# Altium PCB HKCV4.PcbDoc
Units mm, origin at the board's own origin, x right, y up, seen from the top; angles counter-clockwise.
Board outline 37 x 37 mm, 4 copper layers (Top, Route2, Route3, Bottom), stack 2.11 mm thick; 65 components, 63 nets, 314 pads, 464 vias.
Unrouted connection lines stored in the file: 66.
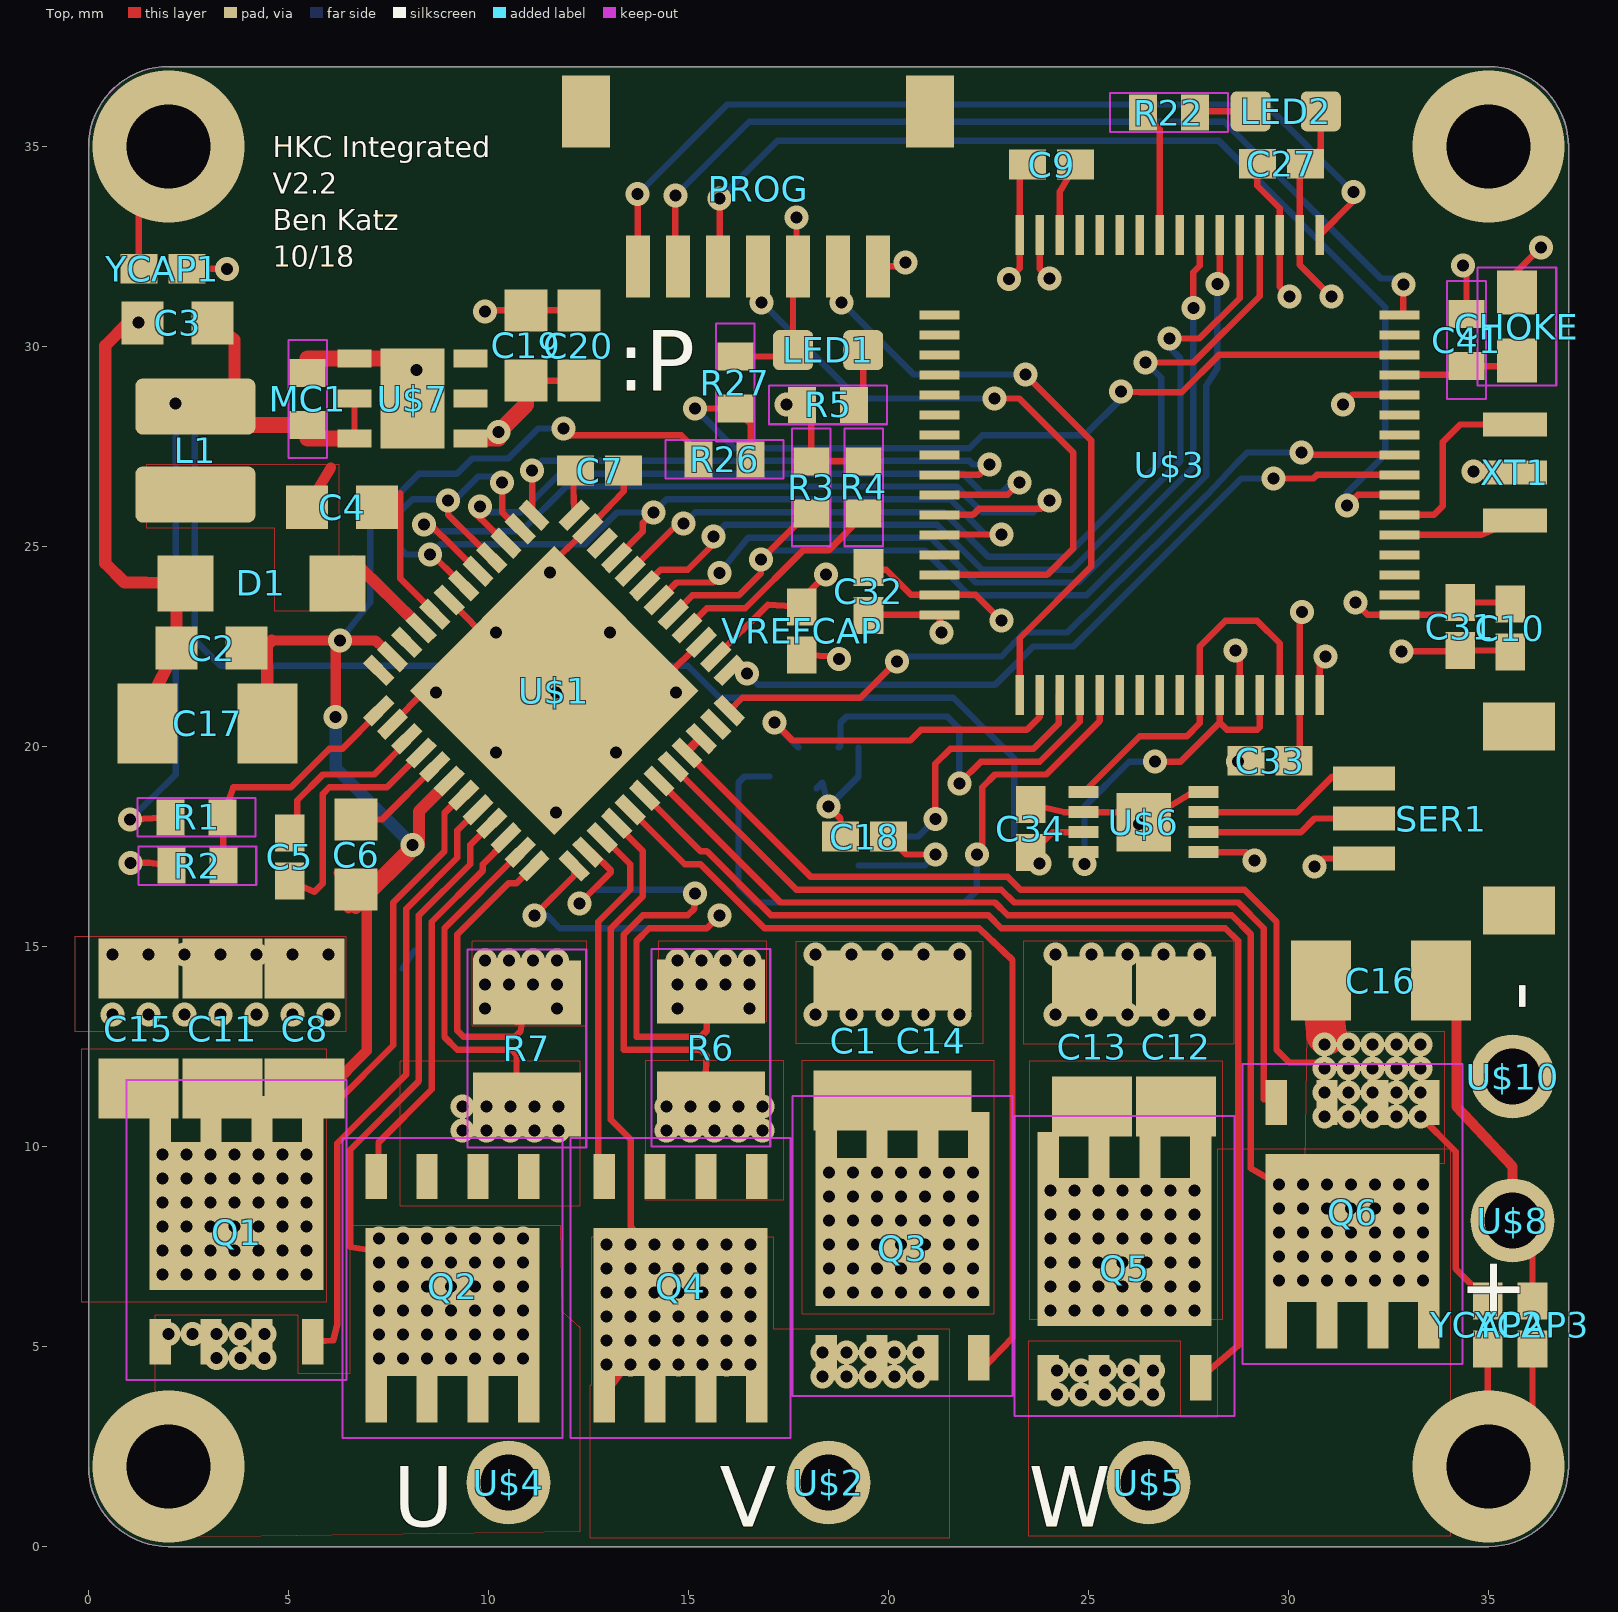
[diagram p0: Top view]
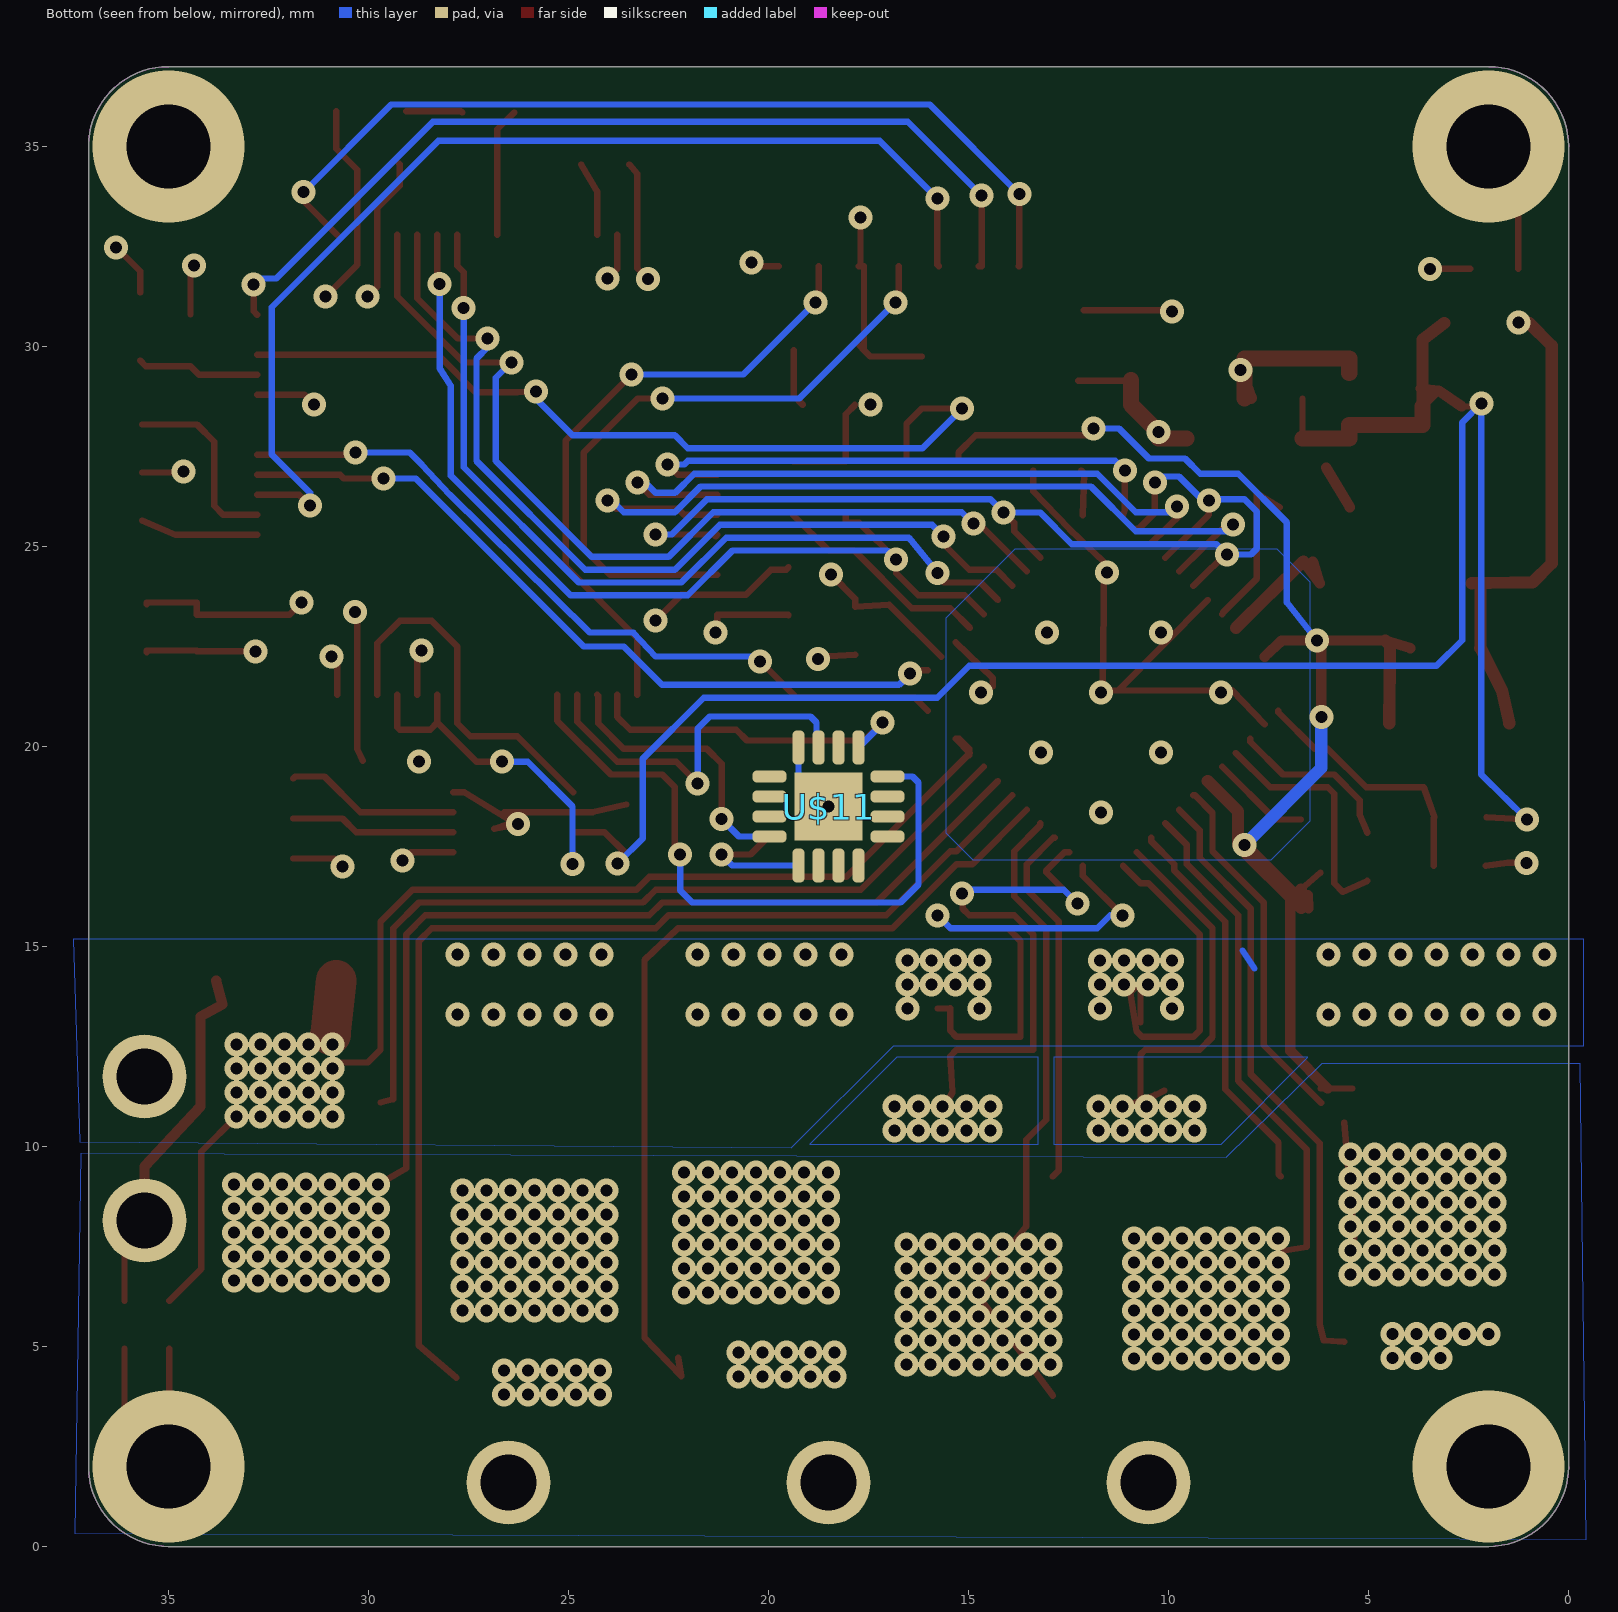
[diagram p1: Bottom view, seen from below]
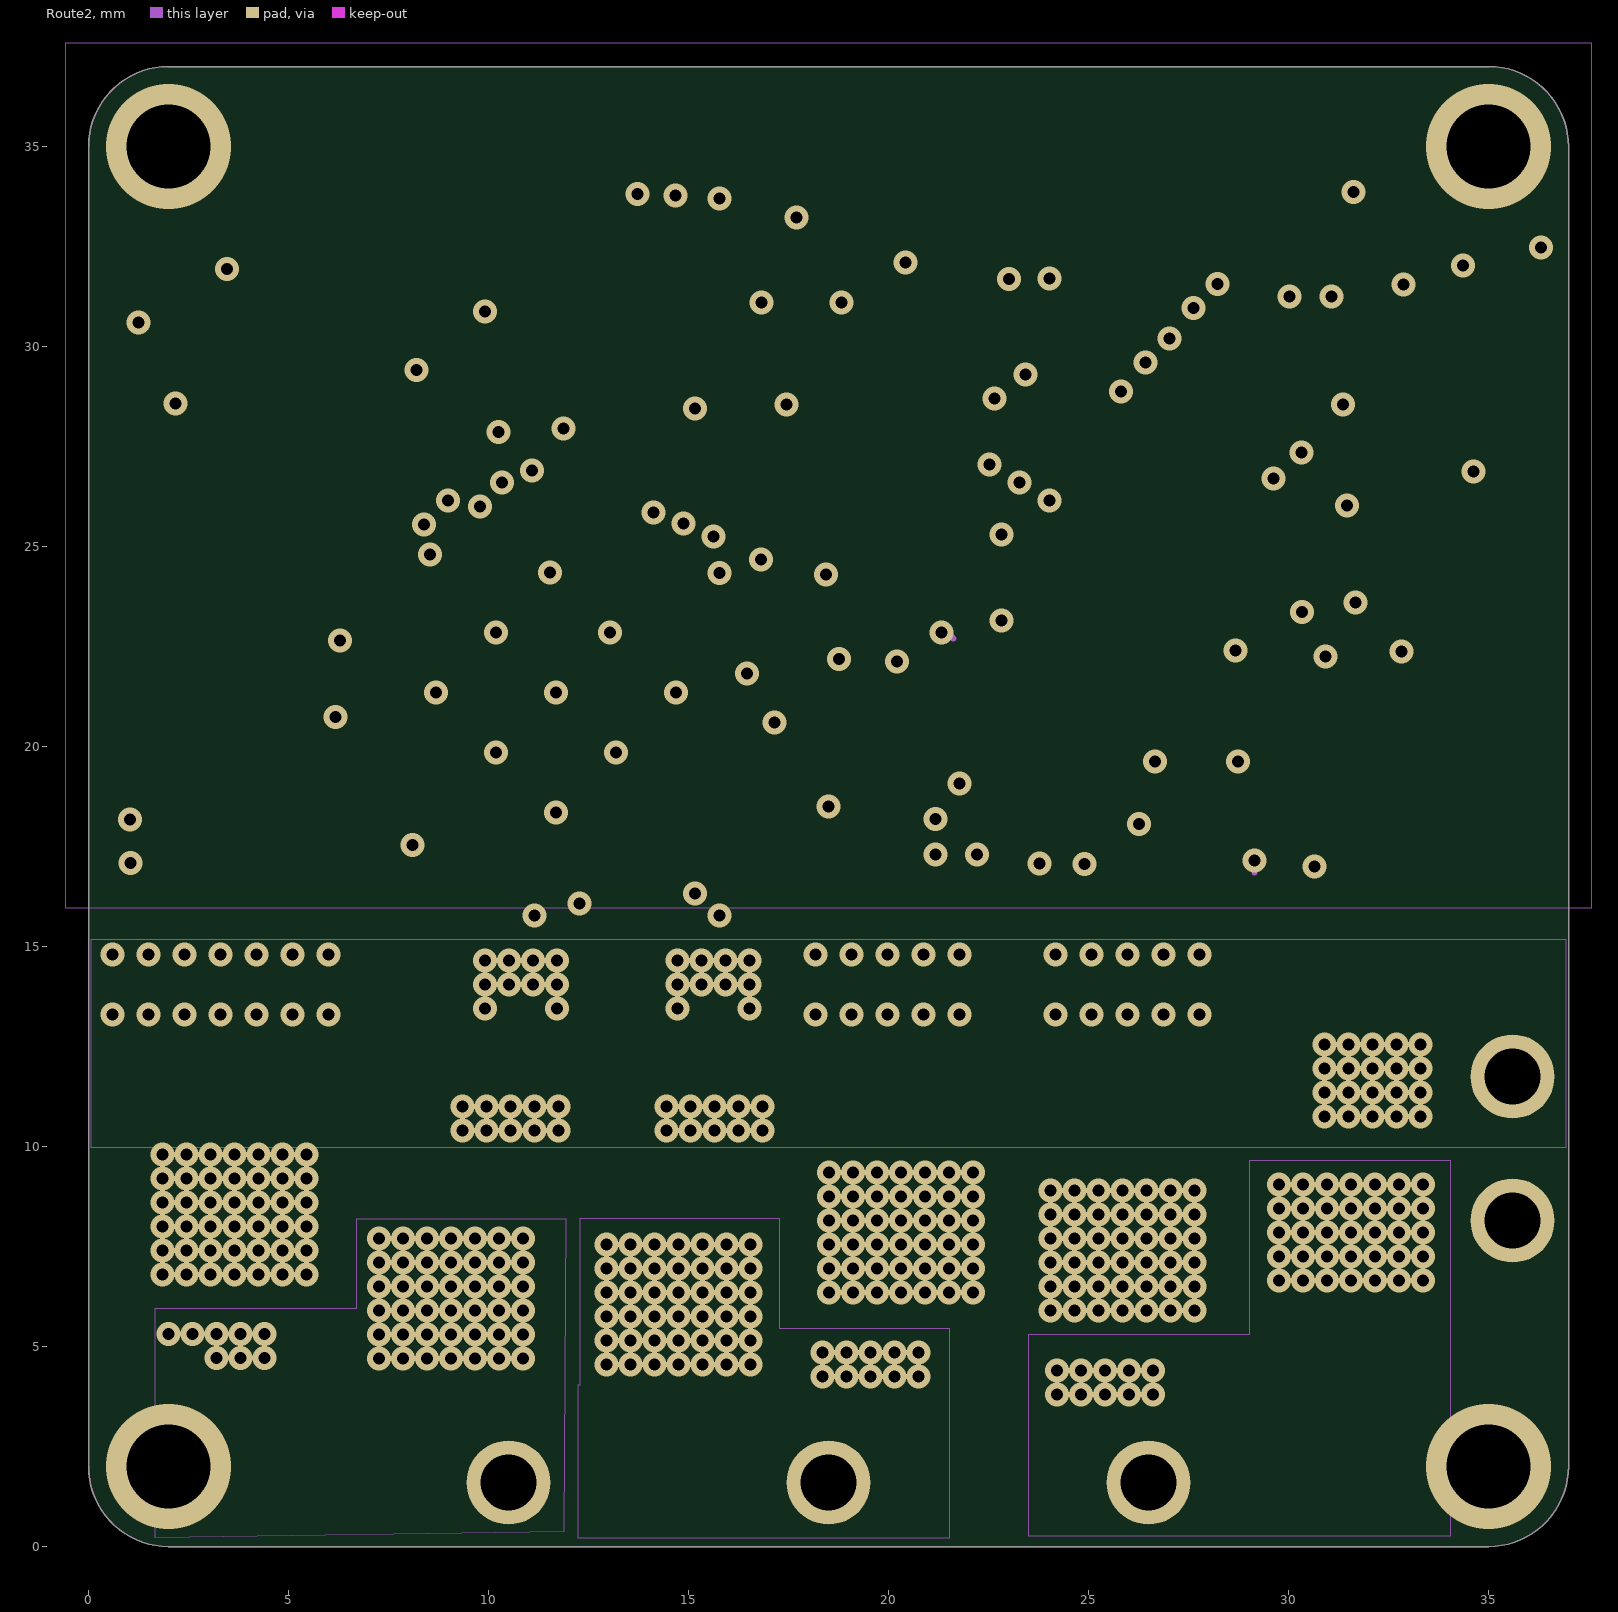
[diagram p2: Route2]
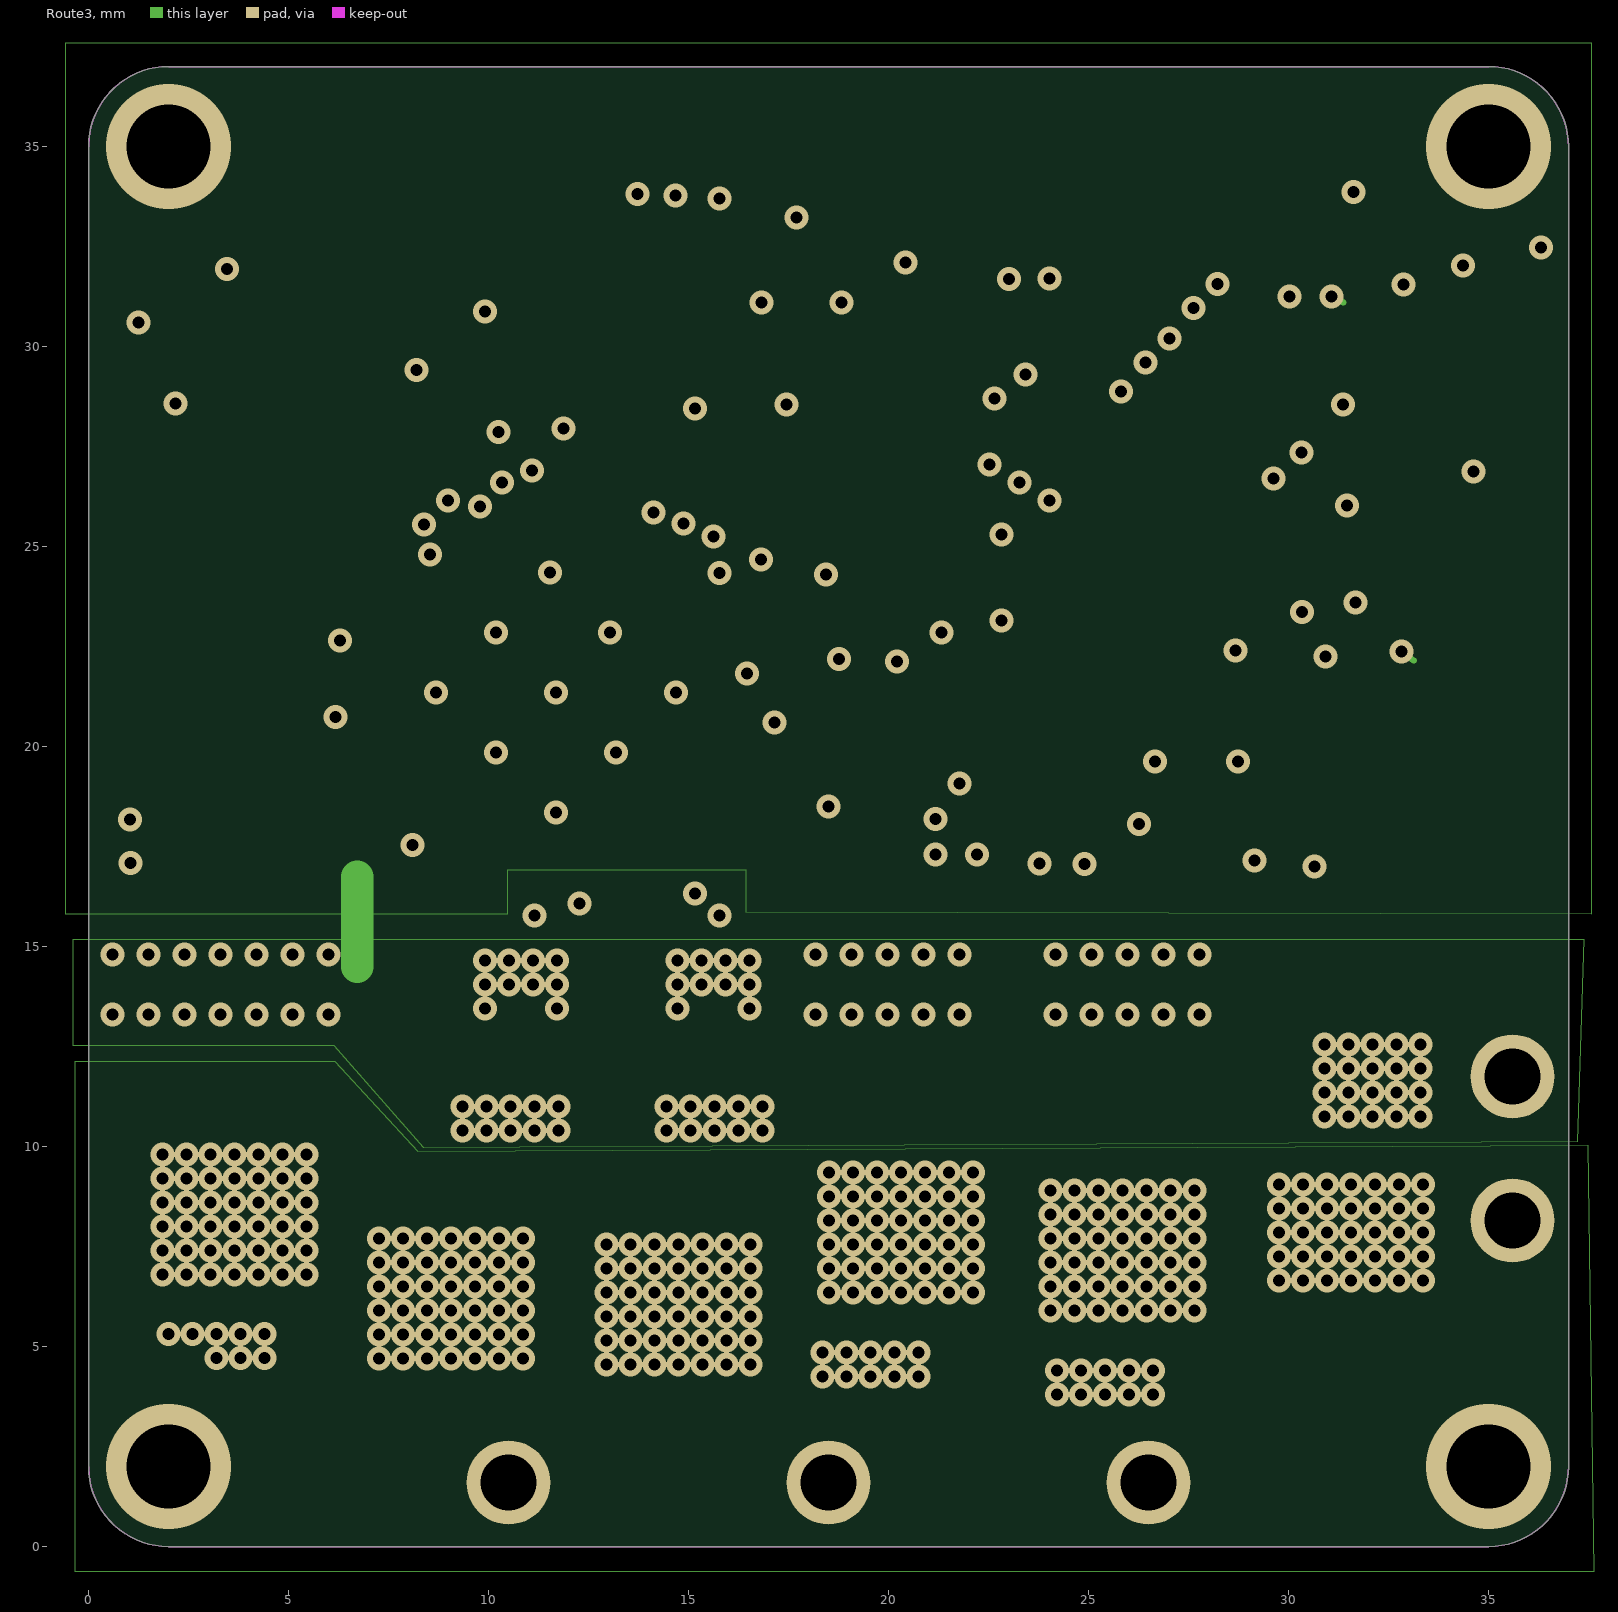
[diagram p3: Route3]

## Layer stack, top to bottom
Top Solder: solder mask 0.0102, Solder Resist, Dk 3.5
Top: signal copper 0.035
Dielectric 1: prepreg 1.5, FR-4, Dk 4.8
Route2: signal copper 0.035
Dielectric3: core 0.15, FR-4, Dk 4.8
Route3: signal copper 0.035
Dielectric2: dielectric 0.32, FR-4, Dk 4.8
Bottom: signal copper 0.035
Bottom Solder: solder mask 0.0102, Solder Resist, Dk 3.5

## Board outline
37,2 37,35 ccw(c35,35) 35,37 2,37 ccw(c2,35) 0,35 0,2 ccw(c2,2) 2,0 35,0 ccw(c35,2)

## Design rules (kind name [scope] priority, off if disabled: settings)
BoardOutlineClearance mdCopperDimension [All] p1: gap=0.254 ignorepadtopadclearanceinfootprint=FALSE except(0: Arc-SplitContinuation Track-SplitContinuation SMDPad-SplitContinuation THPad-SplitContinuation Via-SplitContinuation Fill-SplitContinuation Poly-SplitContinuation Region-SplitContinuation Text-SplitContinuation; 0.152: Poly-OutlineEdge Poly-CavityEdge Poly-CutoutEdge Poly-SplitBarrior)
Clearance Clearance_for_PolygonClass_Isolate_12 [InPolygonClass('Isolate_12') vs IsArc Or IsTrack Or IsPad Or IsVia Or IsFill Or IsRegion Or IsText] p1: gap=0.305 ignorepadtopadclearanceinfootprint=FALSE
Clearance Clearance_for_PolygonClass_Isolate_10 [InPolygonClass('Isolate_10') vs IsArc Or IsTrack Or IsPad Or IsVia Or IsFill Or IsRegion Or IsText] p2: gap=0.254 ignorepadtopadclearanceinfootprint=FALSE
Clearance "Clearance (Same Net)" [All] p3: gap=0.152 ignorepadtopadclearanceinfootprint=FALSE
Clearance [All] p4: gap=0.152 ignorepadtopadclearanceinfootprint=FALSE
HoleSize [All] p1: absolutevalues=TRUE maxlimit=2540 minlimit=0.3 maxpercent=80.000 minpercent=20.000
HoleToHoleClearance mdDrill [All] p1: gap=0.152 allowstackedmicrovias=TRUE
MinimumSolderMaskSliver [All] p1 off: minsoldermaskwidth=0.254
PasteMaskExpansion Expansion_SMDPaste_OFF [InPadClass('SMDPaste_OFF')] p1: expansion=0
PasteMaskExpansion mlMinCreamFrame [All] p2: expansion=0
PolygonConnect PolygonConnect_For_PolygonThermal_ON_Width100000_Gap100000 [InPolygonClass('PolygonThermal_ON_Width100000_Gap100000') vs Not IsVia] p1: connectstyle=Relief reliefconductorwidth=0.254 reliefentries=4 polygonreliefangle="90 Angle" airgapwidth=0.254
PolygonConnect PolygonConnect_For_PolygonThermal_OFF [InPolygonClass('PolygonThermal_OFF')] p2: connectstyle=Direct reliefconductorwidth=0.254 reliefentries=4 polygonreliefangle="90 Angle" airgapwidth=0.254
PolygonConnect ThermalVias [IsVia] p3: connectstyle=Direct reliefconductorwidth=0.254 reliefentries=4 polygonreliefangle="90 Angle" airgapwidth=0.254
PolygonConnect [All] p4: connectstyle=Relief reliefconductorwidth=0.254 reliefentries=4 polygonreliefangle="90 Angle" airgapwidth=0.254
RoutingVias [All] p1: holewidth=0.3 width=0.6 viastyle="Through Hole" minholewidth=0.3 minwidth=0.6 maxholewidth=2.54 maxwidth=2.54
SolderMaskExpansion Expansion_SMDSolder_OFF [InPadClass('SMDSolder_OFF')] p1: expansion=0 istentingtop=FALSE
SolderMaskExpansion mlMinStopFrame [All] p2: expansion=0.102 istentingtop=FALSE
Width [All] p1: maxlimit=0.254 minlimit=0.152 preferedwidth=0.152
26 further rules are at their usual default settings.

## Classes and differential pairs
polygon class PolygonThermal_ON_Width100000_Gap100000: Polygon_2_Net_SPA Polygon_2_Net_SPB
polygon class PolygonThermal_OFF: Polygon_1_Net_3V3 Polygon_1_Net_+24V Polygon_1_Net_GND Polygon_1_Net_PHASA Polygon_1_Net_PHASB Polygon_1_Net_PHASC Polygon_1_Net_SPA Polygon_1_Net_SPB Polygon_1_Net_SW Polygon_2_Net_+24V Polygon_2_Net_GND Polygon_2_Net_PHASA Polygon_2_Net_PHASB Polygon_2_Net_PHASC Polygon_3_Net_+24V Polygon_3_Net_GND Polygon_4_Net_+24V Polygon_4_Net_GND Polygon_5_Net_+24V Polygon_5_Net_GND Polygon_6_Net_GND Polygon_7_Net_GND Polygon_8_Net_GND Polygon_9_Net_GND Polygon_10_Net_GND Polygon_11_Net_GND
polygon class Isolate_12: Polygon_11_Net_GND
polygon class Isolate_10: Polygon_1_Net_3V3 Polygon_1_Net_+24V Polygon_1_Net_GND Polygon_1_Net_PHASA Polygon_1_Net_PHASB Polygon_1_Net_PHASC Polygon_1_Net_SPA Polygon_1_Net_SPB Polygon_2_Net_PHASA Polygon_2_Net_PHASB Polygon_2_Net_PHASC Polygon_2_Net_SPA Polygon_2_Net_SPB Polygon_3_Net_GND Polygon_4_Net_+24V Polygon_5_Net_+24V Polygon_6_Net_GND Polygon_7_Net_GND Polygon_9_Net_GND Polygon_10_Net_GND
pad class SMDSolder_OFF: U$7-1 U$7-2 U$7-3 U$7-4 U$7-5 U$7-6 U$7-EXP U$11-1 U$11-2 U$11-3 U$11-4 U$11-5 U$11-6 U$11-7 U$11-8 U$11-9 U$11-10 U$11-11 U$11-12 U$11-13 U$11-14 U$11-15 U$11-16 U$11-TH
pad class SMDPaste_OFF: Q1-EP Q2-EP Q3-EP Q4-EP Q5-EP Q6-EP U$7-1 U$7-2 U$7-3 U$7-4 U$7-5 U$7-6 U$7-EXP U$11-1 U$11-2 U$11-3 U$11-4 U$11-5 U$11-6 U$11-7 U$11-8 U$11-9 U$11-10 U$11-11 U$11-12 U$11-13 U$11-14 U$11-15 U$11-16 U$11-TH

## Components (designator, comment, footprint, x,y, rotation, side; value= is the part's Value field where it differs from the comment)
C1 "10" C1206K 19.13,12.65 r90 top
C2 ".1 uF" C0603K 3.08,22.46 r180 top
C3 "22 uF" C0603K 2.23,30.59 r180 top
C4 ".1 uF" C0603K 6.34,25.98 r0 top
C5 "47 nF" C0402K 5.03,17.24 r90 top
C6 "1 uF" C0603K 6.69,17.3 r90 top
C7 "1 uF" C0402K 12.78,26.9 r0 top
C8 "10" C1206K 5.4,12.95 r90 top
C9 "4.7" C0402K 24.08,34.55 r0 top
C10 "1uF" C0402K 35.54,22.96 r270 top
C11 "10" C1206K 3.35,12.95 r90 top
C12 "10" C1206K 27.19,12.5 r90 top
C13 "10" C1206K 25.09,12.5 r90 top
C14 "10" C1206K 21.07,12.65 r90 top
C15 "10" C1206K 1.25,12.95 r90 top
C16 "10" C1206K 32.31,14.15 r180 top
C17 ".1 uF" C1206K 2.98,20.58 r180 top
C18 ".1 uF" C0402K 19.4,17.75 r180 top
C19 "22uf" C0603K 10.94,30.03 r90 top
C20 "22uf" C0603K 12.26,30.02 r90 top
C27 "100nF" C0402K 29.83,34.57 r0 top
C31 "100nF" C0402K 34.29,23 r270 top
C32 "100nF" C0402K 19.5,23.88 r90 top
C33 ".1 uF" C0402K 29.54,19.64 r0 top
C34 ".1 uF" C0402K 23.56,17.95 r90 top
C41 "100nF" C0402 34.45,30.16 r90 top
CHOKE "600r" 0603 35.71,30.5 r270 top
D1 "" SOD123 4.32,24.08 r180 top
L1 "22uH" SDR0302 2.67,27.4 r0 top
LED1 "G" LED-0603 18.49,29.91 r90 top
LED2 "G" LED-0603 29.93,35.88 r270 top
MC1 "1uf" C0402 5.48,28.69 r90 top
PROG "SM07B-SRSS-TB" SM07B-SRSS-TB 16.74,34.98 r180 top
Q1 "TPH" TRANS_TPH5900CNH,L1Q 3.7,7.91 r90 top
Q2 "TPH" TRANS_TPH5900CNH,L1Q 9.1,6.46 r270 top
Q3 "TPH" TRANS_TPH5900CNH,L1Q 20.35,7.51 r90 top
Q4 "TPH" TRANS_TPH5900CNH,L1Q 14.8,6.46 r270 top
Q5 "TPH" TRANS_TPH5900CNH,L1Q 25.9,7.01 r90 top
Q6 "TPH" TRANS_TPH5900CNH,L1Q 31.6,8.31 r270 top
R1 "54.9k" R0402 2.7,18.23 r180 top
R2 "10k" R0402 2.72,17.02 r0 top
R3 "10k" R0402 18.07,26.48 r90 top
R4 "10k" R0402 19.38,26.48 r90 top
R5 "200" R0402 18.49,28.54 r180 top
R6 ".001" R1210 15.56,12.47 r270 top
R7 ".001" R1210 10.96,12.45 r270 top
R22 "200" R0402 27.01,35.85 r180 top
R26 "150k" R0402 15.9,27.18 r180 top
R27 "10k" R0402 16.17,29.1 r270 top
SER1 "SM03B-SRSS-TB" SM03B-SRSS-TB 34.86,18.2 r90 top
U$1 "DRV8323RH" QFN50P700X700X90-49N 11.64,21.4 r45 top
U$2 "" 18_AWG_PAD 18.5,1.6 r0 top
U$3 "STM32F446RET6" TQFP64 27.03,27.04 r90 top
U$4 "" 18_AWG_PAD 10.5,1.6 r0 top
U$5 "" 18_AWG_PAD 26.5,1.6 r0 top
U$6 "" TDFN 27.88,18.86 r270 top
U$7 "LDFM" DFN6-3X3 8.1,28.7 r180 top
U$8 "" 18_AWG_PAD 35.6,8.15 r0 top
U$10 "" 18_AWG_PAD 35.6,11.75 r90 top
U$11 "MA700" QFN16 18.5,18.5 r0 bottom
VREFCAP "100nF" C0402K 17.83,22.89 r270 top
XT1 "CSTCE" CSTCE 35.66,26.85 r90 top
YCAP1 "100nF" C0402K 1.86,31.94 r180 top
YCAP2 "100nF" C0402K 34.98,5.54 r270 top
YCAP3 "100nF" C0402K 36.1,5.54 r270 top

## Footprints (in the part's own frame and the unit in brackets; to place one, negate y for a bottom-side part, rotate by r counter-clockwise, add the part's x,y. Pads: shape width x height; smd on the part's side, far side on the other; paste and mask are expansions set on the pad)
18_AWG_PAD [mm] "18_AWG_PAD"
  round 2.1 hole 1.4: P$1(0,0)
  body extent -1.06,-1.06 1.06,1.06, height 1.27
0603 [mm] "0603"
  rect 1.1x1 smd: 1(-0.85,0) 2(0.85,0)
  Top keep-out lines w0.051: 1.473,-0.983 -1.473,-0.983 -1.473,0.983 1.473,0.983 1.473,-0.983
  body extent -1.5,-1.01 1.5,1.01, height 3.81
C0402 [mm] "C0402"
  rect 0.7x0.9 smd: 1(-0.65,0) 2(0.65,0)
  Top keep-out lines w0.051: -1.473,0.483 -1.473,-0.483 1.473,-0.483 1.473,0.483 -1.473,0.483
  body extent -1.5,-0.51 1.5,0.51, height 3.81
C0402K [mm] "C0402K"
  rect 0.925x0.74 smd: 1(-0.6,0) 2(0.6,0)
  body extent -1.06,-0.37 1.06,0.37, height 3.81
C0603K [mm] "C0603K"
  rect 1.05x1.08 smd: 1(-0.875,0) 2(0.875,0)
  body extent -1.4,-0.54 1.4,0.54, height 3.81
C1206K [mm] "C1206K"
  rect 1.5x2 smd: 1(-1.5,0) 2(1.5,0)
  body extent -2.25,-1 2.25,1, height 3.81
CSTCE [mm] "CSTCE"
  rect 0.6x1.6 smd: 1(-1.2,0) 2(0,0) 3(1.2,0)
  body extent -1.5,-0.8 1.5,0.8, height 1.27
DFN6-3X3 [mm] "DFN6-3X3"
  rect 0.85x0.45 smd paste+0 mask+0: 1(-1.45,1) 2(-1.45,0) 3(-1.45,-1) 4(1.45,-1) 5(1.45,0) 6(1.45,1)
  rect 1.6x2.5 smd paste+0 mask+0: EXP(0,0)
  body extent -1.93,-1.56 1.93,1.56, height 3.81
LED-0603 [mm] "LED-0603"
  rrect30% 1x1 smd: A(0,-0.877) C(0,0.877)
  body extent -0.51,-1.39 0.51,1.39, height 1.27
QFN16 [mm] "QFN16"
  rrect75% 0.85x0.3 smd paste+0 mask+0: 1(-1.475,0.75) 2(-1.475,0.25) 3(-1.475,-0.25) 4(-1.475,-0.75) 9(1.475,-0.75) 10(1.475,-0.25) 11(1.475,0.25) 12(1.475,0.75)
  rrect75% 0.3x0.85 smd paste+0 mask+0: 5(-0.75,-1.475) 6(-0.25,-1.475) 7(0.25,-1.475) 8(0.75,-1.475) 13(0.75,1.475) 14(0.25,1.475) 15(-0.25,1.475) 16(-0.75,1.475)
  rect 1.7x1.7 smd paste+0 mask+0: TH(0,0)
  body extent -1.91,-1.91 1.91,1.91, height 3.81
QFN50P700X700X90-49N [mil] "QFN50P700X700X90-49N"
  rect 32x12 smd: 1(-136,108) 2(-136,89) 3(-136,69) 4(-136,49) 5(-136,30) 6(-136,10) 7(-136,-10) 8(-136,-30) 9(-136,-49) 10(-136,-69) 11(-136,-89) 12(-136,-108) 25(136,-108) 26(136,-89) 27(136,-69) 28(136,-49) 29(136,-30) 30(136,-10) 31(136,10) 32(136,30) 33(136,49) 34(136,69) 35(136,89) 36(136,108)
  rect 12x32 smd: 13(-108,-136) 14(-89,-136) 15(-69,-136) 16(-49,-136) 17(-30,-136) 18(-10,-136) 19(10,-136) 20(30,-136) 21(49,-136) 22(69,-136) 23(89,-136) 24(108,-136) 37(108,136) 38(89,136) 39(69,136) 40(49,136) 41(30,136) 42(10,136) 43(-10,136) 44(-30,136) 45(-49,136) 46(-69,136) 47(-89,136) 48(-108,136)
  rect 201x201 smd: 49(0,0)
  body extent -152,-152 152,152, height 150
R0402 [mm] "R0402"
  rect 0.7x0.9 smd: 1(-0.65,0) 2(0.65,0)
  Top keep-out lines w0.051: 1.473,0.483 1.473,-0.483 -1.473,-0.483 -1.473,0.483 1.473,0.483
  body extent -1.5,-0.51 1.5,0.51, height 3.81
R1210 [mm] "R1210"
  rect 1.6x2.7 smd: 1(-1.4,0) 2(1.4,0)
  Top keep-out lines w0.051: 2.473,-1.483 -2.473,-1.483 -2.473,1.483 2.473,1.483 2.473,-1.483
  body extent -2.5,-1.51 2.5,1.51, height 3.81
SDR0302 [mm] "SDR0302"
  rrect25% 3x1.4 smd: 1(0,1.1) 2(0,-1.1)
  body extent -1.5,-1.8 1.5,1.8, height 3.81
SM03B-SRSS-TB [mm] "SM03B-SRSS-TB"
  rect 0.6x1.55 smd: 1(-1,2.975) 2(0,2.975) 3(1,2.975)
  rect 1.2x1.8 smd: FIT@1(-2.3,-0.9) FIT@2(2.3,-0.9)
  body extent -2.9,-1.8 2.9,3.75, height 3.81
SM07B-SRSS-TB [mm] "SM07B-SRSS-TB"
  rect 0.6x1.55 smd: 1(-3,2.975) 2(-2,2.975) 3(-1,2.975) 4(0,2.975) 5(1,2.975) 6(2,2.975) 7(3,2.975)
  rect 1.2x1.8 smd: FIT@1(-4.3,-0.9) FIT@2(4.3,-0.9)
  body extent -4.9,-1.8 4.9,3.75, height 3.81
SOD123 [mm] "SOD123"
  rect 1.4x1.4 smd: A(1.9,0) C(-1.9,0)
  body extent -2.6,-0.84 2.6,0.84, height 3.81
TDFN [mm] "TDFN"
  rect 0.3x0.75 smd: 1(0,-3) 2(0.5,-3) 3(1,-3) 4(1.5,-3) 5(1.5,0) 6(1,0) 7(0.5,0) 8(0,0)
  rect 1.46x1.36 smd: 9(0.75,-1.5)
  body extent -0.15,-3.38 1.65,0.38, height 1.27
TQFP64 [mm] "TQFP64"
  rect 0.22x1 smd: 1(-3.75,-5.75) 2(-3.25,-5.75) 3(-2.75,-5.75) 4(-2.25,-5.75) 5(-1.75,-5.75) 6(-1.25,-5.75) 7(-0.75,-5.75) 8(-0.25,-5.75) 9(0.25,-5.75) 10(0.75,-5.75) 11(1.25,-5.75) 12(1.75,-5.75) 13(2.25,-5.75) 14(2.75,-5.75) 15(3.25,-5.75) 16(3.75,-5.75) 33(3.75,5.75) 34(3.25,5.75) 35(2.75,5.75) 36(2.25,5.75) 37(1.75,5.75) 38(1.25,5.75) 39(0.75,5.75) 40(0.25,5.75) 41(-0.25,5.75) 42(-0.75,5.75) 43(-1.25,5.75) 44(-1.75,5.75) 45(-2.25,5.75) 46(-2.75,5.75) 47(-3.25,5.75) 48(-3.75,5.75)
  rect 1x0.22 smd: 17(5.75,-3.75) 18(5.75,-3.25) 19(5.75,-2.75) 20(5.75,-2.25) 21(5.75,-1.75) 22(5.75,-1.25) 23(5.75,-0.75) 24(5.75,-0.25) 25(5.75,0.25) 26(5.75,0.75) 27(5.75,1.25) 28(5.75,1.75) 29(5.75,2.25) 30(5.75,2.75) 31(5.75,3.25) 32(5.75,3.75) 49(-5.75,3.75) 50(-5.75,3.25) 51(-5.75,2.75) 52(-5.75,2.25) 53(-5.75,1.75) 54(-5.75,1.25) 55(-5.75,0.75) 56(-5.75,0.25) 57(-5.75,-0.25) 58(-5.75,-0.75) 59(-5.75,-1.25) 60(-5.75,-1.75) 61(-5.75,-2.25) 62(-5.75,-2.75) 63(-5.75,-3.25) 64(-5.75,-3.75)
  body extent -6.25,-6.25 6.25,6.25, height 3.81
TRANS_TPH5900CNH,L1Q [mm] "TRANS_TPH5900CNH,L1Q"
  rect 1.13x0.53 smd: 1(-2.79,1.905) 2(-2.79,0.635) 3(-2.79,-0.635) 4(-2.79,-1.905)
  rect 1.33x0.53 smd: 5(2.69,-1.905) 6(2.69,-0.635) 7(2.69,0.635) 8(2.69,1.905)
  rect 3.7x4.35 smd paste+0: EP(0.35,0)
  Top keep-out lines w0.05: -3.75,2.75 -3.75,-2.75 3.75,-2.75 3.75,2.75 -3.75,2.75
  body extent -3.78,-2.78 3.78,2.78, height 3.81

## Part data
C1 C8 C11 C12 C13 C14 C15 C16 C17: library part C1206K, PackageName=C1206K
C2 C3 C4 C6 C19 C20: library part C0603K, PackageName=C0603K
C5 C7 C9 C10 C18 C27 C31 C32 C33 C34 VREFCAP YCAP1 YCAP2 YCAP3: library part C0402K, PackageName=C0402K
C41 MC1: library part C0402, PackageName=C0402
CHOKE: library part 0603, PackageName=0603
D1: library part SOD123, PackageName=SOD123
L1: library part SDR0302, PackageName=SDR0302
LED1 LED2: library part LED-0603, PackageName=LED-0603
Q1 Q2 Q3 Q4 Q5 Q6: library part TRANS_TPH5900CNH,L1Q, PackageName=TRANS_TPH5900CNH,L1Q
R1 R2 R3 R4 R5 R22 R26 R27: library part R0402, PackageName=R0402
R6 R7: library part R1210, PackageName=R1210
U$1: library part QFN50P700X700X90-49N, PackageName=QFN50P700X700X90-49N
U$2 U$4 U$5 U$8 U$10: library part 18_AWG_PAD, PackageName=18_AWG_PAD
U$3: library part TQFP64, PackageName=TQFP64
U$6: library part TDFN, PackageName=TDFN
U$7: library part DFN6-3X3, PackageName=DFN6-3X3
U$11: library part QFN16, PackageName=QFN16
PROG: PackageName=SM07B-SRSS-TB
SER1: PackageName=SM03B-SRSS-TB
XT1: PackageName=CSTCE

## Via types
v1: diameter 0.6/0.6/0.6/0.6 (per signal layer), hole 0.3, Top to Bottom, 460 vias
v2: diameter 3.8/3.116/3.116/3.8 (per signal layer), hole 2.1, Top to Bottom, 4 vias

## Nets (pads, with @x,y where several pads share a name; then routed paths per layer and width w, separated by ;. In a path a pad name is that pad's centre, name@x,y a point inside that pad or via, vN(x,y) a via of type N, cw(c..) or ccw(c..) an arc to the next point about the centre after c; other vN are vias at no path point)
3V3: C9.1 C10.1 C18.1 C19.1 C20.1 C27.1 C31.1 C32.1 C33.1 CHOKE.1 PROG.1 R3.2 R4.2 R5.2 U$1.26 U$3.1 U$3.19 U$3.32 U$3.48 U$3.64 U$6.5 U$7.1 U$11.13 VREFCAP.1 | length 33
  Top w0.16: C19.1 10.95,29.145 C20.1 ; U$1.26 15.684,22.244 16.98,23.54 VREFCAP.1 17.83,23.69 v1(18.44,24.3) ; R5.2 18.07,28.31 R3.2 R4.2 ; C32.1 19.51,23.29 U$3.48 21.28,22.89 v1(21.32,22.85) ; PROG.1 20.42,32.005 v1(20.42,32.1) ; C18.1 20.45,17.3 v1(21.18,17.3) ; v1(23.01,31.69) 23.28,31.96 U$3.32 23.28,34.315 C9.1 ; U$6.5 28.94,17.36 v1(29.15,17.15) ; C33.1@28.72,19.62 v1(28.74,19.62) 28.76,19.64 C33.1 ; C27.1 29.22,34.56 29.22,34.02 29.78,33.46 U$3.19 29.78,31.49 v1(30.02,31.25) ; U$3.64 30.78,22.11 v1(30.92,22.25) ; v1(31.67,23.6) 31.98,23.29 U$3.1 34.29,23.29 C31.1 35.54,23.6 C10.1 ; CHOKE.1@35.71,31.35 35.71,31.88 v1(36.31,32.48)
  Top w0.406: U$7.1 10.25,27.7 v1(10.25,27.86) 10.94,28.55 C19.1
  Route2 w0.16: v1(21.32,22.85) 21.47,22.85 21.62,22.7 ; v1@29.15,16.85 v1(29.15,17.15) ; v1(30.02,31.25) v1@30.17,31.1 ; v1(30.92,22.25) v1@31.07,22.4 ; v1(31.67,23.6) v1@31.67,23.75
  Bottom w0.16: U$11.13 20.905,17.025 v1(21.18,17.3)
  other v1: 17.45,28.55
5V: C3.1 C34.1 L1.1 MC1.1 R1.2 U$6.3 U$7.5 U$7.6 | length 54
  Top w0.16: v1(1.04,18.18) 1.15,18.18 R1.2 ; v1(2.18,28.58) 2.26,28.5 L1.1 ; U$7.6 U$7.5 ; v1(23.77,17.08) 23.77,17.3 C34.1 23.59,17.35 24.1,17.86 U$6.3
  Top w0.2: L1.1@3.25,28.9 L1.1@3.65,28.5
  Top w0.26: L1.1 3.25,28.9 L1.1@3.7,28.95
  Top w0.305: C3.1 3.65,30.17 L1.1@3.65,28.5
  Top w0.406: L1.1@3.65,28.5 3.65,28.04 MC1.1 5.48,27.7 U$7.6
  Bottom w0.16: v1(1.04,18.18) 2.18,19.3 v1(2.18,28.58) 2.66,28.1 2.66,22.66 3.3,22.02 14.98,22.02 15.78,21.22 21.62,21.22 23.14,19.7 23.14,17.71 v1(23.77,17.08)
+24V: C1.1 C2.1 C6.1 C8.1 C11.1 C12.1 C13.1 C14.1 C15.1 C16.1 C17.1 Q1.5 Q1.6 Q1.7 Q1.8 Q1.EP Q3.5 Q3.6 Q3.7 Q3.8 Q3.EP Q5.5 Q5.6 Q5.7 Q5.8 Q5.EP R26.2 U$1.6 U$1.7 U$1.47 U$8.P$1 YCAP3.1 | length 59.2
  Top w0.16: Q1.EP@5.36,7.71 Q1.5 ; C8.1 6.02,11.45 C8.1@6.2,11.45 ; C8.1@6.18,11.09 7.62,12.53 7.62,16.1 8.9,17.38 8.9,18.34 9.338,18.778 U$1.7 ; C6.1@6.2,16.845 C6.1 ; v1(11.87,27.95) 12.04,27.78 14.82,27.78 15.25,27.35 R26.2 ; U$8.P$1 36.1,7.65 YCAP3.1
  Top w0.25: C6.1@6.96,15.96 C6.1@6.96,16.26
  Top w0.26: C2.1 4.58,22.65 v1(6.29,22.65) ; C8.1@6.02,11.45 6.96,12.39 C6.1@6.96,15.96 ; v1(6.18,20.74) 6.18,22.54 v1(6.29,22.65) ; C6.1@6.5,15.96 C6.1@6.52,16.28 ; U$1.47 7.172,22.65 v1(6.29,22.65) ; C16.1 33.65,13.55 34.2,13.25 34.2,11 35.6,9.5 U$8.P$1
  Top w0.305: C17.1 4.46,22.53 4.58,22.65 ; C6.1@6.68,15.96 8.26,17.54 8.26,18.379 U$1.6 ; C6.1 6.665,16.105 v1(8.1,17.54)
  Bottom w0.16: v1(6.29,22.65) 7.04,23.6 7.04,25.6 8.26,26.82 9.21,26.82 9.59,27.2 10.49,27.2 11.24,27.95 v1(11.87,27.95)
  Bottom w0.305: v1(6.18,20.74) 6.18,19.46 v1(8.1,17.54)
  other v1: 24.05,5.9 24.65,5.9 25.25,5.9 25.85,5.9 26.45,5.9 27.05,5.9 27.65,5.9 18.51,6.35 19.11,6.35 19.71,6.35 20.31,6.35 20.91,6.35 21.51,6.35 22.11,6.35 24.05,6.5 24.65,6.5 25.25,6.5 25.85,6.5 26.45,6.5 27.05,6.5 27.65,6.5 1.85,6.8 2.45,6.8 3.05,6.8 3.65,6.8 4.25,6.8 4.85,6.8 5.45,6.8 18.51,6.95 19.11,6.95 19.71,6.95 20.31,6.95 20.91,6.95 21.51,6.95 22.11,6.95 24.05,7.1 24.65,7.1 25.25,7.1 25.85,7.1 26.45,7.1 27.05,7.1 27.65,7.1 1.85,7.4 2.45,7.4 3.05,7.4 3.65,7.4 4.25,7.4 4.85,7.4 5.45,7.4 18.51,7.55 19.11,7.55 19.71,7.55 20.31,7.55 20.91,7.55 21.51,7.55 22.11,7.55 24.05,7.7 24.65,7.7 25.25,7.7 25.85,7.7 26.45,7.7 27.05,7.7 27.65,7.7 1.85,8 2.45,8 3.05,8 3.65,8 4.25,8 4.85,8 5.45,8 18.51,8.15 19.11,8.15 19.71,8.15 20.31,8.15 20.91,8.15 21.51,8.15 22.11,8.15 24.05,8.3 24.65,8.3 25.25,8.3 25.85,8.3 26.45,8.3 27.05,8.3 27.65,8.3 1.85,8.6 2.45,8.6 3.05,8.6 3.65,8.6 4.25,8.6 4.85,8.6 5.45,8.6 18.51,8.75 19.11,8.75 19.71,8.75 20.31,8.75 20.91,8.75 21.51,8.75 22.11,8.75 24.05,8.9 24.65,8.9 25.25,8.9 25.85,8.9 26.45,8.9 27.05,8.9 27.65,8.9 1.85,9.2 2.45,9.2 3.05,9.2 3.65,9.2 4.25,9.2 4.85,9.2 5.45,9.2 18.51,9.35 19.11,9.35 19.71,9.35 20.31,9.35 20.91,9.35 21.51,9.35 22.11,9.35 1.85,9.8 2.45,9.8 3.05,9.8 3.65,9.8 4.25,9.8 4.85,9.8 5.45,9.8
BOOT: C4.2 U$1.44 | length 4.1
  Top w0.16: C4.2 7.79,26.335 7.79,24.2 8.627,23.363 U$1.44
CAL: U$1.34
CAN_RX: U$3.59 U$3.61 U$6.4 | length 8.6
  Top w0.16: U$6.4 24.88,17.24 v1(24.9,17.06) ; v1(26.66,19.62) 27.3,19.62 28.28,20.6 ; U$3.59 28.28,20.6 ; U$3.61 29.28,20.48 29.22,20.42 28.46,20.42 28.28,20.6
  Bottom w0.16: v1(24.9,17.06) 24.9,18.5 26.02,19.62 v1(26.66,19.62)
CAN_TX: U$3.58 U$3.62 U$6.1 | length 9.3
  Top w0.16: U$6.1 26.28,20.26 27.46,20.26 27.78,20.58 U$3.58 27.78,22.5 28.42,23.14 29.22,23.14 29.78,22.58 U$3.62
CANH: SER1.3 U$6.7 | length 4.4
  Top w0.16: U$6.7 30.21,18.36 31.1,19.25 31.835,19.25 SER1.3
CANL: SER1.2 U$6.6 | length 4.1
  Top w0.16: U$6.6 30.31,17.86 30.65,18.2 SER1.2
CPH: C5.1 U$1.4 | length 6.1
  Top w0.16: C5.1 5.645,16.365 5.86,16.58 5.86,18.82 6.02,18.98 7.46,18.98 U$1.4
CPL: C5.2 U$1.3 | length 4.3
  Top w0.16: C5.2 5.22,18.305 5.22,18.66 5.86,19.3 7.14,19.3 7.958,20.118 U$1.3@7.958,20.197
CS: U$3.50 U$11.5 | length 8.5
  Top w0.16: v1(17.15,20.6) 17.6,20.15 20.54,20.15 20.81,20.42 23.46,20.42 23.78,20.74 U$3.50
  Bottom w0.16: v1(17.15,20.6) 17.15,20.575 U$11.5
DEVICE3.3: C7.1 U$1.36 | length 1.1
  Top w0.16: U$1.36 12.112,26.832 C7.1
ENABLE: U$1.33 U$1.38 U$1.40 U$1.42 U$3.44 | length 27.8
  Top w0.16: v1(8.54,24.8) 8.429,24.95 U$1.42 ; v1(8.99,26.15) 8.99,25.79 U$1.40 ; v1(10.34,26.6) 10.34,25.85 10.738,25.452 U$1.38 ; U$1.33 13.86,25.38 13.86,25.59 v1(14.12,25.85) ; U$3.44 21.32,25.25 21.37,25.3 v1(22.83,25.3)
  Bottom w0.16: v1(10.34,26.6) 10.19,26.75 9.74,26.75 9.14,26.15 v1(8.99,26.15) 8.96,26.18 8.1,26.18 7.79,25.87 7.79,24.95 7.94,24.8 v1(8.54,24.8) 8.8,25.06 12.42,25.06 13.21,25.85 v1(14.12,25.85) 14.45,26.18 21.54,26.18 22.42,25.3 v1(22.83,25.3)
ENC_A: U$11.6
ENC_B: U$11.2
FAULT: R4.1 U$1.28 | length 5.6
  Top w0.16: U$1.28 15.46,23.46 16.42,23.46 17.86,24.9 18.5,24.9 19.38,25.78 R4.1
FB: R1.1 R2.2 U$1.1 | length 6.5
  Top w0.16: R2.2 3.37,18.21 R1.1 3.62,18.98 5.06,18.98 6.02,19.94 6.34,19.94 7.258,20.858 U$1.1
GHA: Q1.4 U$1.8 | length 15.3
  Top w0.16: Q1.4 6.12,5.15 6.22,5.55 6.22,10.08 7.94,11.8 7.94,15.94 9.22,17.22 9.22,17.902 U$1.8
GHB: Q3.4 U$1.17 | length 22.3
  Top w0.16: U$1.17 14.902,17.06 15.3,17.06 16.9,15.46 22.26,15.46 23.1,14.66 23.1,5.22 22.18,4.26 Q3.4
GHC: Q5.4 U$1.18 | length 27.7
  Top w0.16: U$1.18 15.301,17.38 15.46,17.38 17.06,15.78 22.5,15.78 22.82,15.46 28.42,15.46 28.74,15.14 28.74,5.025 Q5.4
GLA: Q2.4 U$1.10 | length 9.8
  Top w0.16: Q2.4 7.25,9.305 7.25,10.1 8.58,11.43 8.58,15.62 9.86,16.9 9.86,17.06 10.437,17.637 U$1.10
GLB: Q4.4 U$1.15 | length 9.2
  Top w0.16: U$1.15 12.882,17.718 13.54,17.06 13.54,16.42 12.74,15.62 12.74,9.405 Q4.4
GLC: Q6.4 U$1.20 | length 21
  Top w0.16: U$1.20 17.698,16.42 22.82,16.42 23.14,16.1 28.74,16.1 29.38,15.46 29.38,11.185 Q6.4
GND: C1.2 C2.2 C3.2 C7.2 C8.2 C10.2 C11.2 C12.2 C13.2 C14.2 C15.2 C16.2 C17.2 C18.2 C19.2 C20.2 C27.2 C31.2 C32.2 C33.2 C34.2 C41.2 D1.A LED1.C LED2.C MC1.2 PROG.3 Q6.1 Q6.2 Q6.3 R2.1 R6.1 R7.1 R27.1 SER1.1 U$1.2 U$1.12 U$1.13 U$1.21 U$1.22 U$1.27 U$1.35 U$1.43 U$1.49 U$3.12 U$3.18 U$3.31 U$3.47 U$3.60 U$3.63 U$6.2 U$6.8 U$6.9 U$7.4 U$7.EXP U$10.P$1 U$11.8 U$11.TH VREFCAP.2 XT1.2 YCAP1.1 YCAP2.1 | length 133.2
  Top w0.16: v1(1.05,17.09) 1.52,17.09 R2.1 ; YCAP1.1 v1(3.46,31.94) ; U$1.2 8.412,21.411 U$1.49 ; U$1.43 11.25,21.411 U$1.49 ; v1(9.91,30.87) 9.945,30.905 C19.2 C20.2@12.115,30.905 ; R7.1@10.7,13.1 10.7,14.1 R7.1 10.8,12.88 10.66,12.74 9.38,12.74 9.22,12.9 9.22,15.3 10.5,16.58 10.699,16.58 U$1.12 ; v1(11.15,15.78) 12.143,16.773 U$1.13 ; C7.2 13.38,26.379 U$1.35 11.609,24.608 U$1.49 ; U$1.49@14.39,21.5 14.39,21.713 U$1.27 ; U$1.21@14.98,19.78 14.98,19.94 15.237,20.197 15.322,20.197 U$1.21 18.06,16.74 22.98,16.74 23.3,16.42 28.9,16.42 29.7,15.62 29.7,12.42 30.02,12.1 30.75,12.1 v1(30.9,11.95) ; R6.1@15.77,13.45 15.46,13.46 15.46,12.9 15.3,12.74 13.7,12.74 13.7,15.14 14.02,15.46 15.46,15.46 15.77,15.77 v1(15.77,15.78) ; R27.1 17.453,29.75 LED1.C ; v1(17.7,33.22) 17.7,32.005 PROG.3 17.613,32.005 LED1.C ; LED1.C@17.72,30.017 LED1.C ; VREFCAP.2 18.71,22.24 v1(18.76,22.19) ; v1(18.5,18.5) 18.8,18.2 C18.2 ; C32.2 19.56,24.42 19.94,24.42 20.57,23.79 U$3.47 22.18,23.79 v1(22.82,23.15) ; C34.2 24.39,18.36 U$6.2 26.61,18.36 U$6.9 ; U$3.31 23.78,31.94 v1(24.02,31.7) ; v1(26.26,18.06) 26.86,17.94 U$6.9 ; U$6.8 27.61,18.86 U$6.9 ; v1(28.67,22.4) 28.78,22.29 U$3.60 ; C33.2 30.28,19.94 U$3.63 30.28,23.3 v1(30.34,23.36) ; v1(30.65,17) 30.85,17.2 SER1.1 ; LED2.C 30.807,34.947 C27.2 30.28,34.42 U$3.18 30.28,32.04 v1(31.07,31.25) ; v1(31.36,28.55) 31.6,28.79 U$3.12 ; v1(32.82,22.38) 34.29,22.38 C31.2 35.54,22.4 C10.2 ; v1(33.3,10.75) 34.18,9.87 34.18,6.94 YCAP2.1 ; v1(34.36,32.02) 34.45,31.93 C41.2 ; v1(34.62,26.88) 34.65,26.85 XT1.2
  Top w0.26: C3.2@1.315,30.715 C3.2 ; D1.A@2.205,24.055 D1.A
  Top w0.3: C2.2 D1.A@2.205,24.055
  Top w0.305: v1(1.25,30.6) 1,30.6 0.42,30.02 0.42,24.58 0.9,24.1 1.44,24.1 D1.A ; C17.2 1.66,21.405 C2.2 ; U$7.EXP@7.94,28.71 v1(8.2,29.41)
  Top w0.406: MC1.2 5.48,29.7 U$7.4 8.1,29.7 U$7.EXP ; v1(30.9,12.55) v1@30.95,12.8
  Top w1.016: C16.2 v1@30.95,12.8
  Route3 w0.16: v1@22.82,23 22.67,23.15 v1(22.82,23.15) ; v1(24.02,31.7) v1@24.17,31.7 ; v1@26.26,17.91 v1(26.26,18.06) ; v1@28.52,22.55 v1(28.67,22.4) ; v1@30.19,23.51 v1(30.34,23.36) ; v1@30.5,16.85 v1(30.65,17) ; v1(31.07,31.25) 31.37,31.1 ; v1(32.82,22.38) 33.13,22.15
  Route3 w0.813: 6.72,14.5 6.72,16.74
  Bottom w0.16: 7.85,14.45 8.15,14.9 ; v1(11.15,15.78) 11.46,15.78 11.78,15.46 15.45,15.46 v1(15.77,15.78) ; U$11.TH@18.2,18.95 18.35,19.1 v1(18.5,18.5) 19.25,19.25 U$11.8
  other v1: 30.9,10.75 31.5,10.75 32.1,10.75 32.7,10.75 30.9,11.35 31.5,11.35 32.1,11.35 32.7,11.35 33.3,11.35 31.5,11.95 32.1,11.95 32.7,11.95 33.3,11.95 31.5,12.55 32.1,12.55 32.7,12.55 33.3,12.55 0.6,13.3 1.5,13.3 2.4,13.3 3.3,13.3 4.2,13.3 5.1,13.3 6,13.3 18.17,13.3 19.07,13.3 19.97,13.3 20.87,13.3 21.77,13.3 24.17,13.3 25.07,13.3 25.97,13.3 26.87,13.3 27.77,13.3 9.91,13.45 11.71,13.45 14.73,13.45 16.53,13.45 9.91,14.05 10.51,14.05 11.11,14.05 11.71,14.05 14.73,14.05 15.33,14.05 15.93,14.05 16.53,14.05 9.91,14.65 10.51,14.65 11.11,14.65 11.71,14.65 14.73,14.65 15.33,14.65 15.93,14.65 16.53,14.65 0.6,14.8 1.5,14.8 2.4,14.8 3.3,14.8 4.2,14.8 5.1,14.8 6,14.8 18.17,14.8 19.07,14.8 19.97,14.8 20.87,14.8 21.77,14.8 24.17,14.8 25.07,14.8 25.97,14.8 26.87,14.8 27.77,14.8 11.69,18.35 10.19,19.85 13.19,19.85 8.69,21.35 11.69,21.35 14.69,21.35 10.19,22.85 13.04,22.85 11.54,24.35
I_A: U$1.25 U$3.8 | length 19.1
  Top w0.16: U$1.25 16.377,21.903 v1(16.46,21.82) ; v1(29.62,26.7) 30.62,26.7 30.71,26.79 U$3.8
  Bottom w0.16: v1(16.46,21.82) 16.74,21.54 22.66,21.54 23.62,22.5 24.62,22.5 28.82,26.7 v1(29.62,26.7)
I_B: U$1.24 U$3.9 | length 19.5
  Top w0.16: U$1.24 16.345,21.22 19.3,21.22 v1(20.21,22.13) ; v1(30.32,27.35) 30.38,27.29 U$3.9
  Bottom w0.16: v1(20.21,22.13) 20.33,22.25 22.82,22.25 23.38,22.85 24.47,22.85 27.97,26.3 28.67,27.05 28.97,27.35 v1(30.32,27.35)
I_C: U$1.23
INDICATOR: R22.2 U$3.25 | length 3.2
  Top w0.16: R22.2 26.78,35.43 U$3.25
MCO: U$3.5 XT1.1 | length 3
  Top w0.16: U$3.5 34.82,25.29 XT1.1
MISO: U$3.52 U$11.7 | length 9.5
  Top w0.16: v1(21.77,19.08) 22.31,19.62 23.78,19.62 24.78,20.62 U$3.52
  Bottom w0.16: U$11.7 18.8,20.025 18.8,20.6 18.95,20.75 21.47,20.75 21.77,20.45 v1(21.77,19.08)
MOSI: U$3.53 U$11.4 | length 16.6
  Top w0.16: v1(22.21,17.3) 22.34,17.43 22.34,18.98 22.66,19.3 23.94,19.3 25.28,20.64 U$3.53
  Bottom w0.16: U$11.4 16.4,19.25 16.25,19.1 16.25,16.55 16.7,16.1 21.91,16.1 22.21,16.4 v1(22.21,17.3)
N$1: LED1.A R5.1 | length 1.5
  Top w0.16: R5.1 19.367,28.767 LED1.A
N$2: C41.1 CHOKE.2 U$3.13 | length 3.1
  Top w0.16: U$3.13 34.23,29.29 C41.1 35.57,29.51 CHOKE.2
N$3: C9.2 U$3.30 | length 1.9
  Top w0.16: U$3.30 24.28,33.875 C9.2
N$4: YCAP1.2 | length 3.4
  Top w0.16: YCAP1.2 1.26,34.26 v2(2,35)
N$5: 
  other v2: 35,35
N$6: YCAP2.2 YCAP3.2 | length 6.3
  Top w0.16: YCAP2.2 34.98,2.02 v2(35,2) 36.1,3.1 YCAP3.2
N$7: 
  other v2: 2,2
N$9: U$11.1
N$24: R26.1 R27.2 U$3.14 | length 21.5
  Top w0.16: v1(15.16,28.45) R27.2 16.55,28.07 R26.1 ; v1(25.81,28.87) 26.28,28.86 27.33,28.86 28.26,29.79 U$3.14
  Bottom w0.16: v1(15.16,28.45) 16.15,27.46 22.02,27.46 22.34,27.78 24.9,27.78 25.81,28.69 v1(25.81,28.87)
N$28: LED2.A R22.1 | length 1.4
  Top w0.16: R22.1 27.69,35.88 LED2.A
N$30: U$3.6 XT1.3 | length 4.8
  Top w0.16: U$3.6 33.63,25.79 33.86,26.02 33.86,27.62 34.29,28.05 XT1.3
NRST: PROG.5 U$3.7 | length 27.5
  Top w0.16: PROG.5 15.78,32.045 v1(15.78,33.7) ; v1(31.46,26.02) 31.73,26.29 U$3.7
  Bottom w0.16: v1(15.78,33.7) 17.22,35.14 28.26,35.14 32.42,30.98 32.42,27.3 31.46,26.34 v1(31.46,26.02)
PHASA: Q1.1 Q1.2 Q1.3 Q2.5 Q2.6 Q2.7 Q2.8 Q2.EP U$1.9 U$4.P$1 | length 12.6
  Top w0.16: Q2.EP@7.11,7.4 7.08,7.4 6.54,7.49 6.54,9.92 8.26,11.64 8.26,15.78 9.54,17.06 9.54,17.54 U$1.9
  other v1: 3.2,4.71 3.8,4.71 4.4,4.71 7.26,4.7 7.86,4.7 8.46,4.7 9.06,4.7 9.66,4.7 10.26,4.7 10.86,4.7 2,5.31 2.6,5.31 3.2,5.31 3.8,5.31 4.4,5.31 7.26,5.3 7.86,5.3 8.46,5.3 9.06,5.3 9.66,5.3 10.26,5.3 10.86,5.3 7.26,5.9 7.86,5.9 8.46,5.9 9.06,5.9 9.66,5.9 10.26,5.9 10.86,5.9 7.26,6.5 7.86,6.5 8.46,6.5 9.06,6.5 9.66,6.5 10.26,6.5 10.86,6.5 7.26,7.1 7.86,7.1 8.46,7.1 9.06,7.1 9.66,7.1 10.26,7.1 10.86,7.1 7.26,7.7 7.86,7.7 8.46,7.7 9.06,7.7 9.66,7.7 10.26,7.7 10.86,7.7
PHASB: Q3.1 Q3.2 Q3.3 Q4.5 Q4.6 Q4.7 Q4.8 Q4.EP U$1.16 U$2.P$1 | length 16.2
  Top w0.16: Q4.5 14.85,6.4 13.56,8 13.56,10.17 13.06,10.67 13.06,15.46 13.86,16.26 13.86,17.38 13.203,18.038 U$1.16
  other v1: 18.35,4.25 18.95,4.25 19.55,4.25 20.15,4.25 20.75,4.25 12.95,4.55 13.55,4.55 14.15,4.55 14.75,4.55 15.35,4.55 15.95,4.55 16.55,4.55 18.35,4.85 18.95,4.85 19.55,4.85 20.15,4.85 20.75,4.85 12.95,5.15 13.55,5.15 14.15,5.15 14.75,5.15 15.35,5.15 15.95,5.15 16.55,5.15 12.95,5.75 13.55,5.75 14.15,5.75 14.75,5.75 15.35,5.75 15.95,5.75 16.55,5.75 12.95,6.35 13.55,6.35 14.15,6.35 14.75,6.35 15.35,6.35 15.95,6.35 16.55,6.35 12.95,6.95 13.55,6.95 14.15,6.95 14.75,6.95 15.35,6.95 15.95,6.95 16.55,6.95 12.95,7.55 13.55,7.55 14.15,7.55 14.75,7.55 15.35,7.55 15.95,7.55 16.55,7.55
PHASC: Q5.1 Q5.2 Q5.3 Q6.5 Q6.6 Q6.7 Q6.8 Q6.EP U$1.19 U$5.P$1 | length 23
  Top w0.16: U$1.19 17.299,16.1 22.66,16.1 22.98,15.78 28.58,15.78 29.06,15.3 29.06,9.46 v1(29.76,9.05)
  other v1: 24.21,3.8 24.81,3.8 25.41,3.8 26.01,3.8 26.61,3.8 24.21,4.4 24.81,4.4 25.41,4.4 26.01,4.4 26.61,4.4 29.76,6.65 30.36,6.65 30.96,6.65 31.56,6.65 32.16,6.65 32.76,6.65 33.36,6.65 29.76,7.25 30.36,7.25 30.96,7.25 31.56,7.25 32.16,7.25 32.76,7.25 33.36,7.25 29.76,7.85 30.36,7.85 30.96,7.85 31.56,7.85 32.16,7.85 32.76,7.85 33.36,7.85 29.76,8.45 30.36,8.45 30.96,8.45 31.56,8.45 32.16,8.45 32.76,8.45 33.36,8.45 30.36,9.05 30.96,9.05 31.56,9.05 32.16,9.05 32.76,9.05 33.36,9.05
PWMA: U$1.41 U$3.43 | length 21.3
  Top w0.16: v1(8.39,25.55) 8.547,25.55 U$1.41 ; U$3.43 22.11,25.79 22.26,25.94 23.81,25.94 v1(24.02,26.15) v1@23.99,26.15
  Bottom w0.16: v1(8.39,25.55) 8.56,25.38 10.82,25.38 11.94,26.5 21.7,26.5 22.34,25.86 23.62,25.86 23.91,26.15 v1(24.02,26.15)
PWMB: U$1.39 U$3.42 | length 17.7
  Top w0.16: v1(9.79,26) 9.648,25.85 U$1.39 ; U$3.42 22.98,26.29 v1(23.27,26.6)
  Bottom w0.16: v1(9.79,26) 9.88,25.86 10.82,25.86 11.78,26.82 21.86,26.82 22.34,26.34 22.82,26.34 23.08,26.6 v1(23.27,26.6)
PWMC: U$1.37 U$3.41 | length 14
  Top w0.16: v1(11.09,26.9) 11.09,25.927 U$1.37 ; U$3.41 22.26,26.79 v1(22.52,27.05)
  Bottom w0.16: v1(11.09,26.9) 11.33,27.14 22.02,27.14 22.11,27.05 v1(22.52,27.05)
SCK: U$3.51 U$11.12 | length 7
  Top w0.16: v1(21.18,18.19) 21.17,18.34 21.17,19.57 21.54,19.94 23.62,19.94 24.26,20.58 24.26,21.27 U$3.51
  Bottom w0.16: U$11.12 20.74,17.75 v1(21.18,18.19)
SPA: Q2.1 Q2.2 Q2.3 R7.2 U$1.11 | length 9.8
  Top w0.16: R7.2@10.1,11.4 R7.2@10.332,11.284 ; R7.2@10.332,11.292 R7.2@10.332,11.284 ; U$1.11 10.796,17.356 8.9,15.46 8.9,12.74 9.22,12.42 10.58,12.42 10.7,12.3 10.7,11.15 R7.2 R7.2@10.332,11.284
  other v1: 9.35,10.4 9.95,10.4 10.55,10.4 11.15,10.4 11.75,10.4 9.35,11 9.95,11 10.55,11 11.15,11 11.75,11
SPB: Q4.1 Q4.2 Q4.3 R6.2 U$1.14 | length 13.6
  Top w0.16: v1(12.28,16.08) 13.06,16.86 13.06,16.9 12.601,17.359 U$1.14 ; v1(15.16,16.32) 15.14,16.3 15.14,15.94 14.98,15.78 13.86,15.78 13.38,15.3 13.38,12.42 15.3,12.42 15.46,12.26 15.4,11.36 R6.2
  Bottom w0.16: v1(12.28,16.08) 12.62,16.42 15.06,16.42 v1(15.16,16.32)
  other v1: 14.45,10.4 15.05,10.4 15.65,10.4 16.25,10.4 16.85,10.4 14.45,11 15.05,11 15.65,11 16.25,11 16.85,11
SPI-MISO: R3.1 U$1.29 U$3.22 | length 23.9
  Top w0.16: U$1.29 15.098,23.78 16.26,23.78 16.81,24.33 v1(16.81,24.67) 17.73,25.59 18.07,25.59 R3.1 ; v1(28.22,31.56) 28.28,31.62 U$3.22
  Bottom w0.16: v1(16.81,24.67) 17.04,24.9 20.9,24.9 22.02,23.78 24.95,23.78 27.94,26.77 27.94,29.02 28.22,29.45 v1(28.22,31.56)
SPI-MOSI: U$1.30 U$3.23 | length 22
  Top w0.16: U$1.30 14.699,24.1 15.62,24.1 15.93,24.41 v1(15.77,24.34) ; v1(27.62,30.96) 27.62,31.86 27.78,32.02 U$3.23
  Bottom w0.16: v1(15.77,24.34) 16.49,25.22 21.06,25.22 22.18,24.1 24.74,24.1 27.62,26.98 v1(27.62,30.96)
SPI-NSS-DRV: U$1.32 U$3.20 | length 23.1
  Top w0.16: U$1.32 14.733,25.57 v1(14.88,25.57) ; v1(26.42,29.6) 27.62,29.6 29.28,31.26 U$3.20
  Bottom w0.16: v1(14.88,25.57) 15.17,25.86 21.38,25.86 22.5,24.74 24.42,24.74 26.82,27.14 26.82,29.22 26.44,29.6 v1(26.42,29.6)
SPI-SCK: U$1.31 U$3.21 | length 22.7
  Top w0.16: U$1.31 14.301,24.42 14.98,24.42 15.62,25.06 v1(15.62,25.25) ; v1(27.02,30.2) 27.77,30.2 28.78,31.21 U$3.21
  Bottom w0.16: v1(15.62,25.25) 15.91,25.54 21.22,25.54 22.34,24.42 24.58,24.42 27.3,27.14 27.3,29.7 27.02,29.98 v1(27.02,30.2)
SW: C4.1 D1.C L1.2 U$1.45 | length 4.8
  Top w0.26: C4.1 6.06,26.975 ; D1.C@6.39,24.62 D1.C D1.C@6.629,24.63
  Top w0.3: D1.C@6.629,24.63 U$1.45
TCK: PROG.2 U$3.49 | length 15.8
  Top w0.16: PROG.2 18.74,31.1 v1(18.83,31.1) ; U$3.49 23.28,22.71 25.07,24.5 25.07,27.65 v1(23.42,29.3)
  Bottom w0.16: v1(18.83,31.1) 20.63,29.3 v1(23.42,29.3)
TMS: PROG.4 U$3.46 | length 16.4
  Top w0.16: PROG.4 16.74,31.1 v1(16.83,31.1) ; U$3.46 23.96,24.29 24.62,24.95 24.62,27.35 23.27,28.7 v1(22.65,28.7)
  Bottom w0.16: v1(16.83,31.1) 19.23,28.7 v1(22.65,28.7)
USART_RX: PROG.7 U$3.17 | length 23
  Top w0.16: v1(13.73,33.81) 13.73,32.005 PROG.7 ; U$3.17 31.62,33.63 v1(31.62,33.86)
  Bottom w0.16: v1(13.73,33.81) 15.97,36.05 29.43,36.05 v1(31.62,33.86)
USART_TX: PROG.6 U$3.16 | length 23.3
  Top w0.16: v1(14.67,33.77) 14.67,32.005 PROG.6 ; U$3.16 32.87,30.88 v1(32.87,31.55)
  Bottom w0.16: v1(14.67,33.77) 16.52,35.62 28.39,35.62 32.31,31.7 32.72,31.7 v1(32.87,31.55)
VCP: C6.2 U$1.5 | length 2.5
  Top w0.16: C6.2 7.338,18.175 U$1.5
pads on no net: PROG.FIT@1 PROG.FIT@2 SER1.FIT@1 SER1.FIT@2 U$1.46 U$1.48 U$3.2 U$3.3 U$3.4 U$3.10 U$3.11 U$3.15 U$3.24 U$3.26 U$3.27 U$3.28 U$3.29 U$3.33 U$3.34 U$3.35 U$3.36 U$3.37 U$3.38 U$3.39 U$3.40 U$3.45 U$3.54 U$3.55 U$3.56 U$3.57 U$7.2 U$7.3 U$11.3 U$11.9 U$11.10 U$11.11 U$11.14 U$11.15 U$11.16

## Polygon pours and split planes (outlines as drawn)
+24V on Route3 "Polygon_5_Net_+24V" (solid, remove dead copper, pour order 26): -0.33,12.13 6.155,12.13 8.235,9.88 37.479,10.031 37.631,-0.63 -0.33,-0.63
GND on Route3 "Polygon_8_Net_GND" (solid, remove dead copper, pour order 13): -0.377,15.177 37.381,15.177 37.223,10.124 8.383,9.973 6.143,12.523 -0.377,12.523
GND on Route3 "Polygon_1_Net_GND" (solid, remove dead copper, pour order 14): -0.58,15.82 10.48,15.82 10.48,16.92 16.43,16.92 16.43,15.87 37.58,15.82 37.58,37.58 -0.58,37.58
SPA on Bottom "Polygon_2_Net_SPA" (solid, remove dead copper, pour order 2): 6.514,12.227 12.867,12.227 12.867,10.053 8.688,10.053
SPB on Bottom "Polygon_2_Net_SPB" (solid, remove dead copper, pour order 0): 13.253,12.227 16.793,12.227 18.967,10.053 13.253,10.053
+24V on Bottom "Polygon_1_Net_+24V" (solid, remove dead copper, pour order 25): 37.179,9.83 8.553,9.73 6.153,12.08 -0.279,12.08 -0.431,0.17 37.331,0.32
GND on Bottom "Polygon_11_Net_GND" (solid, remove dead copper, pour order 23): 7.287,24.927 13.843,24.927 15.567,23.203 15.567,17.848 14.893,17.173 7.438,17.173 6.463,18.147 6.463,24.103
GND on Bottom "Polygon_2_Net_GND" (solid, remove dead copper, pour order 24): -0.377,15.177 37.381,15.177 37.223,10.124 19.428,9.973 16.868,12.523 -0.377,12.523
SPA on Top "Polygon_1_Net_SPA" (solid, remove dead copper, pour order 20): 7.78,8.52 12.29,8.52 12.29,12.13 7.78,12.13
SPB on Top "Polygon_1_Net_SPB" (solid, remove dead copper, pour order 19): 17.38,12.14 13.92,12.14 13.92,8.67 17.38,8.67
PHASC on Top "Polygon_1_Net_PHASC" (solid, remove dead copper, pour order 12): 23.49,5.13 23.49,0.27 34.05,0.27 34.05,9.93 28.22,9.93 28.22,3.23 27.3,3.23 27.3,5.13
PHASB on Top "Polygon_1_Net_PHASB" (solid, remove dead copper, pour order 21): 12.57,7.73 12.57,4.03 12.53,4.03 12.53,0.22 21.53,0.22 21.53,5.43 17.13,5.43 17.13,7.73
PHASA on Top "Polygon_1_Net_PHASA" (solid, remove dead copper, pour order 9): 1.67,5.8 5.23,5.8 5.23,4.33 6.54,4.33 6.54,8.03 11.789,8.03 11.829,5.887 12.28,5.486 12.28,0.371 1.67,0.219
+24V on Top "Polygon_4_Net_+24V" (solid, remove dead copper, pour order 8): -0.18,6.12 5.95,6.12 5.95,12.43 -0.18,12.43
+24V on Top "Polygon_3_Net_+24V" (solid, remove dead copper, pour order 6): 22.64,5.82 22.64,12.15 17.83,12.15 17.83,5.82
+24V on Top "Polygon_2_Net_+24V" (solid, remove dead copper, pour order 7): 23.53,12.15 28.34,12.15 28.34,5.67 23.53,5.67
SW on Top "Polygon_1_Net_SW" (solid, remove dead copper, pour order 1): 1.46,27.06 6.26,27.06 6.26,23.38 4.66,23.38 4.66,25.46 1.46,25.46
GND on Top "Polygon_9_Net_GND" (solid, remove dead copper, pour order 17): 12.45,13.02 12.45,15.13 9.58,15.13 9.58,13.02
GND on Top "Polygon_7_Net_GND" (solid, remove dead copper, pour order 18): 30.471,12.88 33.89,12.88 33.89,9.57 30.419,9.57
GND on Top "Polygon_6_Net_GND" (solid, remove dead copper, pour order 5): -0.33,15.26 6.43,15.26 6.43,12.87 -0.33,12.87
GND on Top "Polygon_5_Net_GND" (solid, remove dead copper, pour order 4): 23.37,12.57 28.64,12.57 28.64,15.13 23.37,15.13
GND on Top "Polygon_4_Net_GND" (solid, remove dead copper, pour order 3): 17.69,15.13 22.35,15.13 22.35,12.57 17.69,12.57
GND on Top "Polygon_3_Net_GND" (solid, remove dead copper, pour order 16): 14.24,13.13 16.95,13.13 16.95,15.13 14.24,15.13
3V3 on Route2 "Polygon_1_Net_3V3" (solid, remove dead copper, pour order 15): -0.58,15.97 37.58,15.97 37.58,37.58 -0.58,37.58
PHASC on Route2 "Polygon_2_Net_PHASC" (solid, remove dead copper, pour order 11): 23.49,5.3 23.49,0.27 34.05,0.27 34.05,9.64 29.02,9.64 29.02,5.3
PHASB on Route2 "Polygon_2_Net_PHASB" (solid, remove dead copper, pour order 22): 12.28,8.2 12.28,4.03 12.23,4.03 12.23,0.22 21.53,0.22 21.53,5.45 17.28,5.45 17.28,8.2
PHASA on Route2 "Polygon_2_Net_PHASA" (solid, remove dead copper, pour order 10): 1.67,5.96 6.71,5.96 6.71,8.2 11.931,8.2 11.88,0.371 1.67,0.219
GND on Route2 "Polygon_10_Net_GND" (solid, remove dead copper, pour order 27): 0.073,15.177 36.927,15.177 36.927,9.973 0.073,9.973

## Keep-outs
Keep-Out Layer:
  the board outline again, w0

## Silkscreen, mask and mechanical layers (free items; w line width, h text height)
Top Overlay:
  text "HKC Integrated" at 4.6,34.733 h0.52
  text "V2.2" at 4.6,33.819 h0.52
  text "Ben Katz" at 4.6,32.904 h0.52
  text "10/18" at 4.6,31.99 h0.52
  text ":P" at 13.22,28.9 h1.51
  text "-" at 36.42,13.38 h1.51 r90
  text "+" at 35.78,5.54 h1.51 r90
  text "U" at 7.62,0.5 h1.51
  text "V" at 15.78,0.5 h1.51
  text "W" at 23.5,0.5 h1.51
Dimension:
  the board outline again, w0
Unrouted:
  lines w0: 1.25,30.6 1.355,30.59 ; 6.18,11.09 6.2,11.45 ; 6.5,15.96 6.68,15.96 ; 6.665,16.105 6.68,15.96 ; 6.96,15.96 6.68,15.96 ; 7.94,28.71 8.1,28.7 ; 11.64,21.4 11.69,21.35 ; 12.115,30.905 12.26,30.895 ; 14.39,21.5 14.69,21.35 ; 17.45,28.55 17.84,28.54

## Text inside footprints (layer, text, board x,y; h text height)
U$1: tPlace "*" at 6.126,19.766 h1.97 r45; tDocu "*" at 6.126,19.766 h1.97 r45